# Altium PCB GSH_Bed v1.0.PcbDoc (part 5 of 6)
Units mil, origin at the board's own origin, x right, y up, seen from the top; angles counter-clockwise.
Board outline 4724.41 x 4921.3 mil, 2 copper layers (Top Layer, Bottom Layer); 2 components, 3 nets, 5 pads, 0 vias.
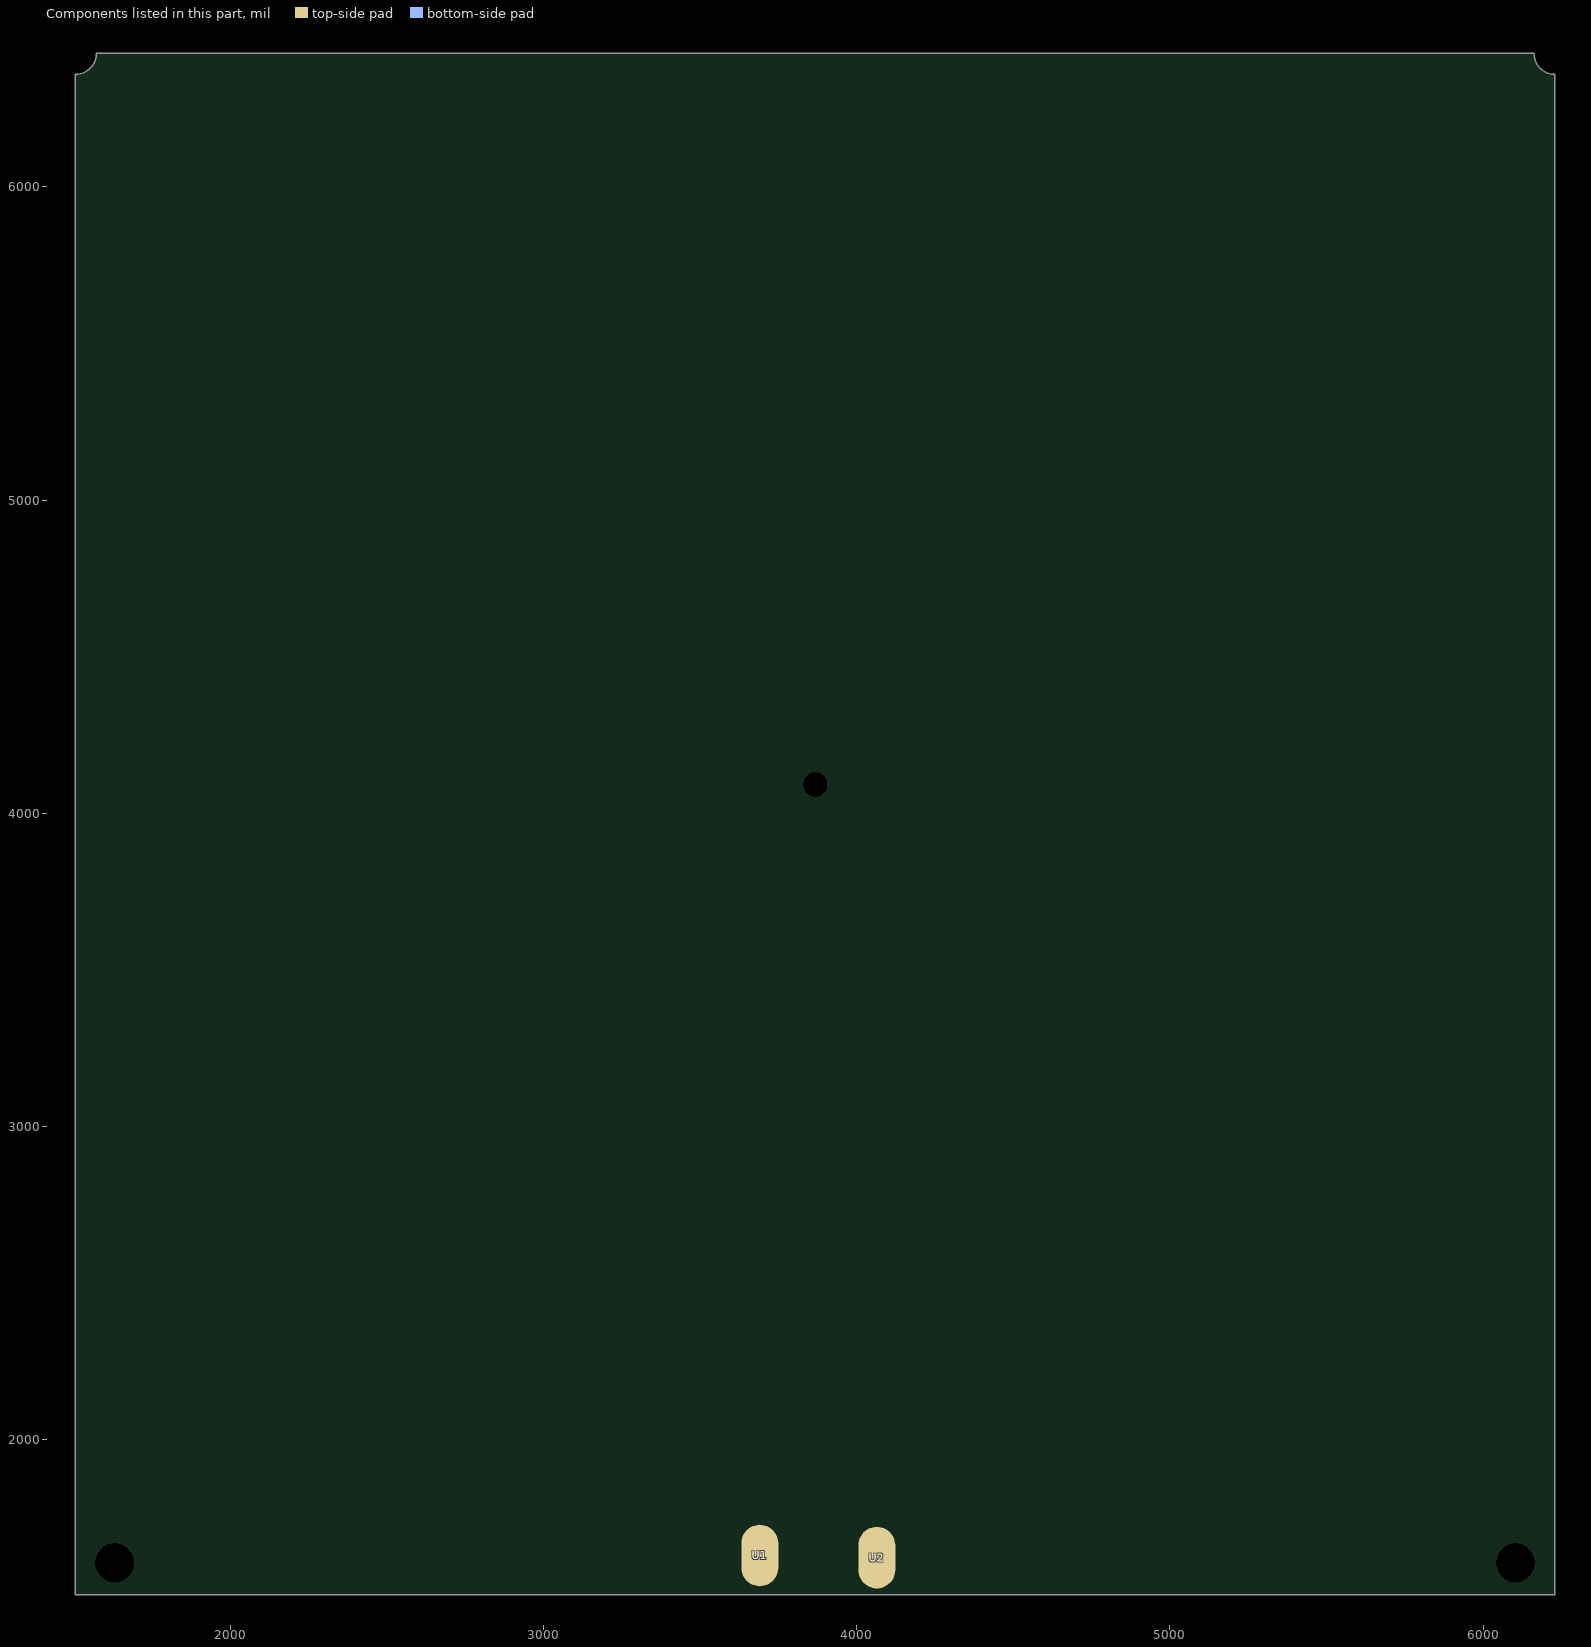
[diagram p5: the components of this part, seen from the top]

## Nets (pads, with @x,y where several pads share a name; then routed paths per layer and width w, separated by ;. In a path a pad name is that pad's centre, name@x,y a point inside that pad or via, vN(x,y) a via of type N, cw(c..) or ccw(c..) an arc to the next point about the centre after c; other vN are vias at no path point) (continued)
copper on no net: (continued)
  Top Layer w25.59: 4133.04,6189.88 4097.61,6189.88 4097.61,6225.32 4133.04,6225.32 4133.04,6296.18 4097.61,6296.18 4097.61,6260.75 4062.17,6260.75 4062.17,6296.18 4026.74,6296.18 4026.74,6225.32 4062.17,6225.32 4062.17,6189.88 4026.74,6189.88 3955.87,6189.88 3955.87,6225.32 3991.31,6225.32 3991.31,6296.19 3955.87,6296.19 3955.87,6260.75 3920.44,6260.75 3920.44,6296.19 3885.01,6296.19 3885.01,6225.32 3920.44,6225.32 3920.44,6189.89 3885.01,6189.89 3885.01,6119.02 3920.44,6119.02 3920.44,6154.45 3991.31,6154.45 3991.31,6119.02 3955.88,6119.02 3955.88,6083.59 3991.31,6083.59 3991.31,6048.15 3920.44,6048.15 3920.44,6083.59 3885,6083.59 3885,6048.15 3885,6012.72 3920.44,6012.72 3920.44,5977.28 3885,5977.28 3885,5906.42 3920.44,5906.42 3920.44,5941.85 3955.87,5941.85 3955.87,5906.42 3991.31,5906.42 3991.31,5977.28 3955.87,5977.28 3955.87,6012.72 4026.74,6012.72 4026.74,5977.29 4062.17,5977.29 4062.17,6012.72 4133.04,6012.72 4133.04,5977.29 4097.61,5977.29 4097.61,5941.85 4133.04,5941.85 4133.04,5906.42 4062.17,5906.42 4062.17,5941.85 4026.73,5941.85 4026.73,5870.98 4026.73,5835.55 4062.17,5835.55 4062.17,5870.98 4133.03,5870.98 4133.03,5835.55 4097.6,5835.55 4097.6,5800.12 4133.03,5800.12 4133.03,5764.69 4062.17,5764.69 4062.17,5800.12 4026.73,5800.12 4026.73,5764.69 3955.86,5764.69 3955.86,5800.13 3991.3,5800.13 3991.3,5870.98 3955.86,5870.98 3955.86,5835.56 3920.43,5835.56 3920.43,5870.98 3884.99,5870.98 3884.99,5800.13 3920.43,5800.13 3920.43,5764.69 3885,5764.69 3884.99,5693.83 3920.43,5693.83 3920.43,5729.26 3991.29,5729.26 3991.29,5693.83 3955.86,5693.83 3955.86,5658.4 3991.29,5658.4 3991.29,5622.96 3920.43,5622.96 3920.43,5658.4 3884.99,5658.4 3884.99,5587.53 3920.42,5587.53 3920.42,5552.09 3884.99,5552.09 3884.99,5481.23 3920.42,5481.23 3920.42,5516.65 3955.86,5516.65 3955.86,5481.23 3991.29,5481.23 3991.29,5552.09 3955.86,5552.09 3955.86,5587.52 3991.29,5587.52 4062.16,5587.52 4062.16,5552.09 4026.72,5552.09 4026.72,5481.22 4062.16,5481.22 4062.16,5516.65 4097.59,5516.65 4097.59,5481.22 4133.02,5481.22 4133.02,5552.09 4097.59,5552.09 4097.59,5587.52 4133.02,5587.52 4133.02,5658.39 4097.59,5658.39 4097.59,5622.95 4026.72,5622.95 4026.72,5658.39 4062.15,5658.39 4062.15,5693.82 4026.72,5693.82 4026.72,5729.25 4097.59,5729.25 4097.59,5693.82 4133.03,5693.82 4133.03,5729.25 4168.46,5729.25 4203.89,5729.25 4203.89,5693.81 4168.46,5693.81 4168.46,5622.95 4203.89,5622.95 4203.89,5658.38 4239.32,5658.38 4239.32,5622.95 4274.76,5622.95 4274.76,5693.81 4239.32,5693.81 4239.32,5729.25 4310.19,5729.25 4310.19,5693.81 4345.62,5693.81 4345.62,5729.25 4416.49,5729.25 4416.49,5693.81 4381.06,5693.81 4381.06,5658.39 4416.49,5658.39 4416.49,5622.95 4345.62,5622.95 4345.62,5658.39 4310.18,5658.39 4310.18,5587.52 4310.18,5552.09 4345.62,5552.09 4345.62,5587.52 4416.48,5587.52 4416.48,5552.09 4381.05,5552.09 4381.05,5516.65 4416.48,5516.65 4416.48,5481.22 4345.62,5481.22 4345.62,5516.65 4310.18,5516.65 4310.18,5481.22 4239.31,5481.22 4239.31,5516.65 4274.75,5516.65 4274.75,5587.52 4239.31,5587.52 4239.31,5552.09 4203.88,5552.09 4203.88,5587.52 4168.45,5587.52 4168.45,5516.65 4203.88,5516.65 4203.88,5481.22 4168.45,5481.23 4168.45,5445.79 4203.89,5445.79 4203.89,5410.35 4168.45,5410.35 4168.45,5339.49 4203.89,5339.49 4203.89,5374.92 4239.31,5374.92 4239.31,5339.49 4274.75,5339.49 4274.75,5410.35 4239.31,5410.35 4239.31,5445.79 4310.18,5445.79 4310.18,5410.35 4345.62,5410.35 4345.62,5445.79 4416.48,5445.79 4416.48,5410.35 4381.05,5410.35 4381.05,5374.92 4416.48,5374.92 4416.48,5339.49 4345.62,5339.49 4345.62,5374.92 4310.18,5374.92 4310.18,5304.06 4310.18,5268.62 4345.61,5268.62 4345.61,5304.06 4416.47,5304.06 4416.47,5268.62 4381.04,5268.62 4381.04,5233.19 4416.47,5233.19 4416.47,5197.76 4345.61,5197.76 4345.61,5233.19 4310.17,5233.19 4310.17,5197.76 4239.31,5197.76 4239.31,5233.2 4274.74,5233.2 4274.74,5304.06 4239.31,5304.06 4239.31,5268.63 4203.88,5268.63 4203.88,5304.06 4168.44,5304.06 4168.44,5233.2 4203.88,5233.2 4203.88,5197.77 4133.01,5197.77 4133.01,5233.2 4097.58,5233.2 4097.58,5197.77 4026.71,5197.77 4026.71,5233.2 4062.14,5233.2 4062.14,5268.63 4026.71,5268.63 4026.71,5304.06 4097.58,5304.06 4097.58,5268.63 4133.02,5268.63 4133.02,5339.49 4097.58,5339.5 4097.58,5374.94 4133.02,5374.94 4133.02,5445.8 4097.58,5445.8 4097.58,5410.36 4062.15,5410.36 4062.15,5445.8 4026.71,5445.8 4026.71,5374.94 4062.15,5374.94 4062.15,5339.5 4026.72,5339.5 3955.85,5339.5 3955.85,5374.94 3991.28,5374.94 3991.28,5445.81 3955.85,5445.81 3955.85,5410.37 3920.42,5410.37 3920.42,5445.81 3884.98,5445.81 3884.98,5374.94 3920.42,5374.94 3920.42,5339.51 3884.98,5339.51 3884.98,5268.64 3920.42,5268.64 3920.42,5304.07 3991.28,5304.07 3991.28,5268.64 3955.85,5268.64 3955.85,5233.21 3991.28,5233.21 3991.28,5197.77 3920.42,5197.77 3920.42,5233.21 3884.98,5233.21 3884.98,5197.77 3884.98,5162.34 3920.41,5162.34 3920.41,5126.9 3884.98,5126.9 3884.98,5056.04 3920.41,5056.04 3920.41,5091.47 3955.85,5091.47 3955.85,5056.04 3991.28,5056.04 3991.28,5126.9 3955.85,5126.9 3955.85,5162.34 4026.71,5162.34 4026.71,5126.9 4062.15,5126.9 4062.15,5162.34 4133.01,5162.34 4133.01,5126.9 4097.58,5126.9 4097.58,5091.47 4133.01,5091.47 4133.01,5056.04 4062.15,5056.04 4062.15,5091.47 4026.71,5091.47 4026.71,5020.6 4026.71,4985.17 4062.14,4985.17 4062.14,5020.61 4133.01,5020.61 4133.01,4985.17 4097.58,4985.17 4097.58,4949.74 4133.01,4949.74 4133.01,4914.31 4062.14,4914.31 4062.14,4949.74 4026.7,4949.74 4026.7,4914.31 3955.84,4914.31 3955.84,4949.75 3991.27,4949.75 3991.27,5020.61 3955.84,5020.61 3955.84,4985.18 3920.4,4985.18 3920.4,5020.61 3884.97,5020.61 3884.97,4949.75 3920.4,4949.75 3920.4,4914.31 3884.97,4914.31 3884.97,4843.45 3920.4,4843.45 3920.4,4878.88 3991.27,4878.88 3991.27,4843.45 3955.84,4843.45 3955.84,4808.01 3991.27,4808.01 3991.27,4772.58 3920.4,4772.58 3920.4,4808.01 3884.97,4808.01 3884.97,4737.15 3920.4,4737.15 3920.4,4701.71 3884.97,4701.71 3884.97,4630.85 3920.4,4630.85 3920.4,4666.28 3955.83,4666.28 3955.83,4630.85 3991.27,4630.85 3991.27,4701.71 3955.83,4701.71 3955.83,4737.15 3991.26,4737.15 4062.13,4737.15 4062.13,4701.7 4026.7,4701.7 4026.7,4630.84 4062.13,4630.84 4062.13,4666.27 4097.56,4666.27 4097.56,4630.84 4133,4630.84 4133,4701.7 4097.56,4701.7 4097.56,4737.14 4133,4737.14 4133,4808 4097.56,4808 4097.56,4772.57 4026.7,4772.57 4026.7,4808 4062.13,4808 4062.13,4843.44 4026.7,4843.44 4026.7,4878.87 4097.56,4878.87 4097.56,4843.44 4133,4843.44 4133,4878.87 4168.43,4878.87 4168.43,4843.44 4203.87,4843.44 4203.87,4878.87 4274.73,4878.87 4274.73,4843.44 4239.3,4843.44 4239.3,4808.01 4274.73,4808.01 4274.73,4772.57 4203.87,4772.57 4203.87,4808.01 4168.43,4808.01 4168.43,4737.15 4203.86,4737.14 4203.86,4701.7 4168.43,4701.7 4168.43,4630.84 4203.86,4630.84 4203.86,4666.27 4239.29,4666.27 4239.29,4630.84 4274.73,4630.84 4274.73,4701.7 4239.29,4701.7 4239.29,4737.14 4274.73,4737.14 4345.59,4737.14 4345.59,4701.7 4310.15,4701.7 4310.15,4630.83 4345.59,4630.83 4345.59,4666.27 4381.02,4666.27 4381.02,4630.83 4416.46,4630.83 4416.46,4701.7 4381.02,4701.7 4381.02,4737.13 4416.45,4737.13 4416.45,4808 4381.02,4808 4381.02,4772.56 4310.15,4772.56 4310.15,4808 4345.59,4808 4345.59,4843.43 4310.15,4843.43 4310.15,4878.87 4381.02,4878.87 4381.02,4843.43 4416.46,4843.43 4416.46,4878.87 4416.46,4914.3 4381.02,4914.3 4381.02,4949.73 4416.46,4949.73 4416.46,5020.6 4381.02,5020.6 4381.02,4985.17 4345.59,4985.17 4345.59,5020.6 4310.16,5020.6 4310.16,4949.73 4345.59,4949.73 4345.59,4914.3 4274.73,4914.3 4274.73,4949.73 4239.29,4949.73 4239.29,4914.3 4168.43,4914.3 4168.43,4949.73 4203.86,4949.73 4203.86,4985.17 4168.43,4985.17 4168.43,5020.6 4239.29,5020.6 4239.29,4985.17 4274.73,4985.17 4274.73,5056.04 4274.73,5091.47 4239.3,5091.47 4239.3,5056.03 4168.44,5056.03 4168.44,5091.47 4203.87,5091.47 4203.87,5126.9 4168.44,5126.9 4168.44,5162.34 4239.3,5162.34 4239.3,5126.9 4274.73,5126.9 4274.73,5162.34 4345.6,5162.34 4345.6,5126.89 4310.17,5126.89 4310.17,5056.03 4345.6,5056.03 4345.6,5091.46 4381.03,5091.46 4381.03,5056.03 4416.47,5056.03 4416.47,5126.89 4381.03,5126.89 4381.03,5162.33 4451.9,5162.32 4451.9,5126.89 4487.33,5126.89 4487.33,5162.33 4558.2,5162.33 4558.2,5126.89 4522.77,5126.89 4522.77,5091.46 4558.2,5091.46 4558.2,5056.02 4487.33,5056.02 4487.33,5091.46 4451.89,5091.46 4451.89,5020.6 4487.33,5020.59 4487.33,4985.15 4451.89,4985.15 4451.89,4914.29 4487.33,4914.29 4487.33,4949.72 4522.76,4949.72 4522.76,4914.29 4558.2,4914.29 4558.2,4985.15 4522.76,4985.15 4522.76,5020.59 4558.19,5020.59 4629.06,5020.59 4629.06,4985.15 4593.63,4985.15 4593.63,4914.29 4629.06,4914.29 4629.06,4949.72 4664.49,4949.72 4664.49,4914.29 4699.93,4914.29 4699.93,4985.15 4664.49,4985.15 4664.49,5020.58 4699.92,5020.58 4699.92,5091.45 4664.49,5091.45 4664.49,5056.02 4593.63,5056.02 4593.63,5091.45 4629.06,5091.45 4629.06,5126.88 4593.63,5126.88 4593.63,5162.32 4664.49,5162.32 4664.49,5126.88 4699.93,5126.88 4699.93,5162.32 4735.36,5162.32 4770.8,5162.32 4770.8,5126.88 4735.36,5126.88 4735.36,5056.01 4770.8,5056.01 4770.8,5091.44 4806.23,5091.44 4806.23,5056.01 4841.66,5056.01 4841.66,5126.88 4806.23,5126.88 4806.23,5162.31 4877.09,5162.31 4877.09,5126.88 4912.53,5126.88 4912.53,5162.31 4983.39,5162.31 4983.39,5126.88 4947.96,5126.88 4947.96,5091.45 4983.39,5091.45 4983.39,5056.01 4912.53,5056.01 4912.53,5091.45 4877.09,5091.45 4877.09,5020.58 4877.09,4985.15 4912.52,4985.15 4912.52,5020.58 4983.39,5020.58 4983.39,4985.15 4947.96,4985.15 4947.96,4949.72 4983.39,4949.72 4983.39,4914.28 4912.52,4914.28 4912.52,4949.72 4877.08,4949.72 4877.08,4914.28 4806.22,4914.28 4806.22,4949.72 4841.65,4949.72 4841.65,5020.58 4806.22,5020.58 4806.22,4985.15 4770.78,4985.15 4770.78,5020.58 4735.35,5020.58 4735.35,4949.72 4770.78,4949.72 4770.78,4914.29 4735.35,4914.29 4735.35,4878.86 4770.79,4878.86 4770.79,4843.42 4735.35,4843.42 4735.35,4772.56 4770.79,4772.56 4770.79,4807.99 4806.22,4807.99 4806.22,4772.56 4841.65,4772.56 4841.65,4843.42 4806.22,4843.42 4806.22,4878.85 4877.09,4878.85 4877.09,4843.42 4912.52,4843.42 4912.52,4878.86 4983.39,4878.86 4983.39,4843.42 4947.95,4843.42 4947.95,4807.99 4983.39,4807.99 4983.39,4772.56 4912.52,4772.56 4912.52,4807.99 4877.08,4807.99 4877.08,4737.12 4877.08,4701.69 4912.52,4701.69 4912.52,4737.12 4983.38,4737.12 4983.38,4701.69 4947.95,4701.69 4947.95,4666.26 4983.38,4666.26 4983.38,4630.82 4912.52,4630.82 4912.52,4666.26 4877.08,4666.26 4877.08,4630.82 ; 5266.82,4630.81 5231.39,4630.81 5231.39,4666.25 5266.82,4666.25 5266.82,4737.11 5231.39,4737.11 5231.39,4701.68 5195.96,4701.68 5195.96,4737.11 5160.52,4737.11 5160.52,4666.25 5195.96,4666.25 5195.96,4630.81 5125.09,4630.81 5125.09,4666.25 5089.66,4666.25 5089.66,4630.81 5018.79,4630.81 5018.79,4666.25 5054.23,4666.25 5054.23,4701.68 5018.79,4701.68 5018.79,4737.11 5089.66,4737.11 5089.66,4701.68 5125.1,4701.68 5125.1,4772.55 5125.1,4807.98 5089.66,4807.98 5089.66,4772.55 5018.8,4772.55 5018.8,4807.98 5054.23,4807.98 5054.23,4843.41 5018.8,4843.41 5018.8,4878.85 5089.66,4878.85 5089.66,4843.41 5125.1,4843.41 5125.1,4878.85 5195.97,4878.85 5195.97,4843.41 5160.54,4843.41 5160.54,4772.55 5195.97,4772.55 5195.97,4807.98 5231.4,4807.98 5231.4,4772.55 5266.84,4772.55 5266.84,4843.41 5231.4,4843.41 5231.4,4878.84 5266.84,4878.84 5266.84,4914.27 5231.4,4914.27 5231.4,4949.71 5266.84,4949.71 5266.84,5020.58 5231.4,5020.58 5231.4,4985.14 5195.97,4985.14 5195.97,5020.58 5160.53,5020.58 5160.53,4949.71 5195.97,4949.71 5195.97,4914.28 5125.1,4914.28 5125.1,4949.71 5089.67,4949.71 5089.67,4914.27 5018.8,4914.27 5018.8,4949.71 5054.23,4949.71 5054.23,4985.14 5018.8,4985.14 5018.8,5020.58 5089.67,5020.58 5089.67,4985.14 5125.11,4985.14 5125.11,5056.01 5125.11,5091.44 5089.67,5091.44 5089.67,5056.01 5018.81,5056.01 5018.81,5091.44 5054.24,5091.44 5054.24,5126.87 5018.81,5126.87 5018.81,5162.31 5089.67,5162.31 5089.67,5126.87 5125.11,5126.87 5125.11,5162.31 5195.98,5162.31 5195.98,5126.86 5160.54,5126.86 5160.54,5056.01 5195.98,5056.01 5195.98,5091.44 5231.41,5091.44 5231.41,5056.01 5266.84,5056.01 5266.84,5126.86 5231.41,5126.86 5231.41,5162.3 5302.27,5162.3 5302.27,5126.86 5337.71,5126.86 5337.71,5162.3 5408.57,5162.3 5408.57,5126.86 5373.14,5126.86 5373.14,5091.44 5408.57,5091.44 5408.57,5056 5337.71,5056 5337.71,5091.44 5302.27,5091.44 5302.27,5020.57 5337.7,5020.56 5337.7,4985.13 5302.27,4985.13 5302.27,4914.27 5337.7,4914.27 5337.7,4949.7 5373.13,4949.7 5373.13,4914.27 5408.57,4914.27 5408.57,4985.13 5373.13,4985.13 5373.13,5020.56 5408.56,5020.56 5479.43,5020.56 5479.43,4985.12 5444,4985.12 5444,4914.26 5479.43,4914.26 5479.43,4949.69 5514.87,4949.69 5514.87,4914.26 5550.3,4914.26 5550.3,4985.12 5514.87,4985.12 5514.87,5020.56 5550.3,5020.56 5550.3,5091.43 5514.86,5091.43 5514.86,5055.99 5444,5055.99 5444,5091.43 5479.43,5091.43 5479.43,5126.85 5444,5126.85 5444,5162.29 5514.86,5162.29 5514.86,5126.85 5550.3,5126.85 5550.3,5162.29 5585.74,5162.29 5621.17,5162.29 5621.17,5126.85 5585.73,5126.85 5585.73,5055.98 5621.17,5055.98 5621.17,5091.42 5656.6,5091.42 5656.6,5055.98 5692.03,5055.98 5692.03,5126.85 5656.6,5126.85 5656.6,5162.29 5727.47,5162.29 5727.47,5126.85 5762.9,5126.85 5762.9,5162.29 5833.77,5162.29 5833.77,5126.85 5798.33,5126.85 5798.33,5091.42 5833.77,5091.42 5833.77,5055.98 5762.9,5055.98 5762.9,5091.42 5727.46,5091.42 5727.46,5020.55 5727.46,4985.12 5762.9,4985.12 5762.9,5020.56 5833.75,5020.56 5833.75,4985.12 5798.32,4985.12 5798.32,4949.69 5833.75,4949.69 5833.75,4914.25 5762.9,4914.25 5762.9,4949.69 5727.45,4949.69 5727.45,4914.25 5656.59,4914.25 5656.59,4949.69 5692.02,4949.69 5692.02,5020.56 5656.59,5020.56 5656.59,4985.13 5621.16,4985.13 5621.16,5020.56 5585.73,5020.56 5585.73,4949.69 5621.16,4949.69 5621.16,4914.26 5585.73,4914.26 5585.73,4843.4 5621.16,4843.4 5621.16,4878.83 5692.02,4878.83 5692.02,4843.4 5656.59,4843.4 5656.59,4807.97 5692.02,4807.97 5692.02,4772.53 5621.16,4772.53 5621.16,4807.97 5585.72,4807.97 5585.72,4737.1 5621.15,4737.1 5621.15,4701.65 5585.72,4701.65 5585.72,4630.79 5621.15,4630.79 5621.15,4666.22 5656.58,4666.22 5656.58,4630.79 5692.02,4630.79 5692.02,4701.65 5656.58,4701.65 5656.58,4737.09 5692.02,4737.09 5762.88,4737.09 5762.88,4701.65 5727.44,4701.65 5727.44,4630.79 5762.88,4630.79 5762.88,4666.22 5798.31,4666.22 5798.31,4630.79 5833.75,4630.79 5833.75,4701.65 5798.31,4701.65 5798.31,4737.09 5833.74,4737.09 5833.74,4807.95 5798.31,4807.95 5798.31,4772.52 5727.44,4772.52 5727.44,4807.95 5762.88,4807.95 5762.88,4843.39 5727.44,4843.39 5727.44,4878.82 5798.31,4878.82 5798.31,4843.39 5833.75,4843.39 5833.75,4878.82 5869.19,4878.82 5869.18,4843.39 5904.61,4843.39 5904.61,4878.82 5975.48,4878.82 5975.48,4843.39 5940.05,4843.39 5940.05,4807.95 5975.48,4807.95 5975.48,4772.52 5904.61,4772.52 5904.61,4807.95 5869.17,4807.95 5869.17,4737.09 5904.61,4737.09 5904.61,4701.65 5869.17,4701.65 5869.17,4630.79 5904.61,4630.79 5904.61,4666.22 5940.04,4666.22 5940.04,4630.79 5975.48,4630.79 5975.48,4701.65 5940.04,4701.65 5940.04,4737.09 5975.48,4737.09 6046.34,4737.09 6046.34,4701.64 6010.91,4701.64 6010.91,4630.78 6046.34,4630.78 6046.34,4666.21 6081.78,4666.21 6081.78,4630.78 6117.21,4630.78 6117.21,4701.64 6081.78,4701.64 6081.78,4737.08 6117.21,4737.08 6117.21,4807.94 6081.78,4807.94 6081.78,4772.51 6010.91,4772.51 6010.91,4807.94 6046.34,4807.94 6046.34,4843.38 6010.91,4843.38 6010.91,4878.81 6081.78,4878.81 6081.78,4843.38 6117.21,4843.38 6117.21,4878.81 6117.21,4914.24 6081.78,4914.24 6081.78,4949.68 6117.21,4949.68 6117.21,5020.55 6081.78,5020.55 6081.78,4985.11 6046.34,4985.11 6046.34,5020.55 6010.91,5020.55 6010.91,4949.68 6046.34,4949.68 6046.34,4914.25 5975.48,4914.25 5975.48,4949.68 5940.04,4949.68 5940.04,4914.25 5869.18,4914.25 5869.18,4949.68 5904.61,4949.68 5904.61,4985.11 5869.18,4985.11 5869.18,5020.55 5940.04,5020.55 5940.04,4985.11 5975.48,4985.11 5975.48,5055.98 5975.48,5091.41 5940.05,5091.41 5940.05,5055.98 5869.19,5055.98 5869.19,5091.41 5904.61,5091.41 5904.61,5126.85 5869.19,5126.85 5869.19,5162.28 5940.05,5162.28 5940.05,5126.85 5975.49,5126.85 5975.49,5162.28 6046.36,5162.28 6046.36,5126.84 6010.92,5126.84 6010.92,5055.98 6046.36,5055.98 6046.36,5091.4 6081.79,5091.4 6081.79,5055.98 6117.23,5055.98 6117.23,5126.84 6081.79,5126.84 6081.79,5162.27 6117.22,5162.27 6117.23,5233.14 6081.8,5233.14 6081.8,5197.7 6010.93,5197.7 6010.93,5233.14 6046.36,5233.14 6046.36,5268.57 6010.93,5268.57 6010.93,5304.01 6081.8,5304.01 6081.8,5268.57 6117.23,5268.57 6117.23,5339.44 6081.8,5339.44 6081.8,5374.87 6117.23,5374.87 6117.23,5445.74 6081.8,5445.74 6081.8,5410.31 6046.37,5410.31 6046.37,5445.74 6010.93,5445.74 6010.93,5374.87 6046.37,5374.87 6046.37,5339.44 6010.94,5339.44 5940.07,5339.44 5940.07,5374.88 5975.5,5374.88 5975.5,5445.74 5940.07,5445.74 5940.07,5410.31 5904.64,5410.31 5904.64,5445.74 5869.2,5445.74 5869.2,5374.88 5904.64,5374.88 5904.64,5339.44 5869.21,5339.44 5869.21,5268.58 5904.64,5268.58 5904.64,5304.02 5975.5,5304.02 5975.5,5268.58 5940.07,5268.58 5940.07,5233.14 5975.5,5233.14 5975.5,5197.71 5904.64,5197.71 5904.64,5233.14 5869.2,5233.14 5869.2,5197.71 5833.77,5197.71 5798.33,5197.71 5798.33,5233.15 5833.77,5233.15 5833.77,5304.02 5798.33,5304.02 5798.33,5268.59 5762.9,5268.59 5762.9,5304.02 5727.47,5304.02 5727.47,5233.15 5762.9,5233.15 5762.9,5197.72 5692.03,5197.72 5692.03,5233.15 5656.6,5233.15 5656.6,5197.72 5585.73,5197.72 5585.73,5233.15 5621.17,5233.15 5621.17,5268.58 5585.73,5268.58 5585.73,5304.02 5656.6,5304.02 5656.6,5268.58 5692.04,5268.58 5692.04,5339.45 5692.04,5374.88 5656.6,5374.88 5656.6,5339.44 5585.74,5339.44 5585.74,5374.88 5621.17,5374.88 5621.17,5410.31 5585.74,5410.31 5585.74,5445.75 5656.6,5445.75 5656.6,5410.31 5692.05,5410.31 5692.05,5445.75 5762.91,5445.75 5762.91,5410.31 5727.47,5410.31 5727.47,5339.44 5762.91,5339.44 5762.91,5374.87 5798.34,5374.87 5798.34,5339.44 5833.77,5339.44 5833.77,5410.31 5798.34,5410.31 5798.34,5445.74 5833.77,5445.74 5833.77,5481.17 5798.34,5481.17 5798.34,5516.61 5833.77,5516.61 5833.77,5587.48 5798.34,5587.48 5798.34,5552.04 5762.91,5552.04 5762.91,5587.48 5727.47,5587.48 5727.47,5516.61 5762.91,5516.61 5762.91,5481.18 5692.04,5481.18 5692.04,5516.6 5656.6,5516.6 5656.6,5481.17 5585.74,5481.17 5585.74,5516.6 5621.17,5516.6 5621.17,5552.04 5585.74,5552.04 5585.74,5587.48 5656.6,5587.48 5656.6,5552.04 5692.05,5552.04 5692.05,5622.9 5692.05,5658.34 5656.61,5658.34 5656.61,5622.9 5585.75,5622.9 5585.75,5658.34 5621.18,5658.34 5621.18,5693.77 5585.75,5693.77 5585.75,5729.2 5656.61,5729.2 5656.61,5693.77 5692.05,5693.77 5692.05,5729.2 5762.92,5729.2 5762.92,5693.77 5727.48,5693.77 5727.48,5622.9 5762.92,5622.9 5762.92,5658.34 5798.35,5658.34 5798.35,5622.9 5833.78,5622.9 5833.78,5693.77 5798.35,5693.77 5798.35,5729.2 5869.22,5729.2 5869.21,5693.77 5904.65,5693.77 5904.65,5729.2 5975.51,5729.2 5975.51,5693.77 5940.08,5693.77 5940.08,5658.34 5975.51,5658.34 5975.51,5622.9 5904.65,5622.9 5904.65,5658.34 5869.21,5658.34 5869.21,5587.47 5904.64,5587.47 5904.64,5552.02 5869.21,5552.02 5869.21,5481.17 5904.64,5481.17 5904.64,5516.6 5940.08,5516.6 5940.08,5481.17 5975.51,5481.17 5975.51,5552.02 5940.08,5552.02 5940.08,5587.46 5975.51,5587.46 6046.38,5587.46 6046.38,5552.02 6010.94,5552.02 6010.94,5481.16 6046.38,5481.16 6046.38,5516.59 6081.81,5516.59 6081.81,5481.16 6117.24,5481.16 6117.24,5552.02 6081.81,5552.02 6081.81,5587.46 6117.24,5587.46 6117.24,5658.33 6081.81,5658.33 6081.81,5622.89 6010.94,5622.89 6010.94,5658.33 6046.37,5658.33 6046.37,5693.76 6010.94,5693.76 6010.94,5729.19 6081.81,5729.19 6081.81,5693.76 6117.24,5693.76 6117.24,5729.19 6117.24,5764.62 6081.81,5764.62 6081.81,5800.06 6117.24,5800.06 6117.24,5870.92 6081.81,5870.92 6081.81,5835.49 6046.38,5835.49 6046.38,5870.92 6010.95,5870.92 6010.95,5800.06 6046.38,5800.06 6046.38,5764.62 5975.51,5764.62 5975.51,5800.06 5940.08,5800.06 5940.08,5764.62 5869.21,5764.62 5869.21,5800.06 5904.65,5800.06 5904.65,5835.49 5869.21,5835.49 5869.21,5870.92 5940.08,5870.92 5940.08,5835.49 5975.52,5835.49 5975.52,5906.36 5975.52,5941.79 5940.08,5941.79 5940.08,5906.35 5869.22,5906.35 5869.22,5941.79 5904.65,5941.79 5904.65,5977.22 5869.22,5977.22 5869.22,6012.65 5940.08,6012.65 5940.08,5977.22 5975.52,5977.22 5975.52,6012.65 ; 5266.83,4630.81 5302.26,4630.81 5302.26,4666.24 5337.7,4666.24 5337.7,4630.81 5408.56,4630.81 5408.56,4666.24 5373.13,4666.24 5373.13,4701.68 5408.56,4701.68 5408.56,4737.11 5337.7,4737.11 5337.7,4701.68 5302.26,4701.68 5302.26,4772.55 5337.69,4772.55 5337.69,4807.98 5302.26,4807.98 5302.26,4878.84 5337.69,4878.84 5337.69,4843.41 5373.13,4843.41 5373.13,4878.84 5408.56,4878.84 5408.56,4807.98 5373.13,4807.98 5373.13,4772.54 5444,4772.54 5479.43,4772.54 5479.43,4807.98 5443.99,4807.98 5443.99,4878.84 5479.43,4878.84 5479.43,4843.41 5514.86,4843.41 5514.86,4878.84 5550.29,4878.84 5550.29,4807.98 5514.86,4807.98 5514.86,4772.53 5550.29,4772.53 5550.29,4701.67 5514.85,4701.67 5514.85,4737.1 5443.99,4737.1 5443.99,4701.67 5479.42,4701.67 5479.42,4666.23 5443.99,4666.23 5443.99,4630.8 5514.85,4630.8 5514.85,4666.23 5550.29,4666.23 5550.28,4595.37 5550.28,4559.94 5514.84,4559.94 5514.84,4595.37 5443.98,4595.37 5443.98,4559.94 5479.41,4559.94 5479.41,4524.5 5443.98,4524.5 5443.98,4489.07 5514.84,4489.07 5514.84,4524.5 5550.28,4524.5 5550.28,4453.63 5514.84,4453.63 5514.84,4418.2 5550.28,4418.2 5550.28,4347.34 5514.84,4347.34 5514.84,4382.77 5479.41,4382.77 5479.41,4347.34 5443.98,4347.34 5443.98,4418.2 5479.41,4418.2 5479.41,4453.64 5408.54,4453.64 5373.11,4453.64 5373.11,4418.21 5408.55,4418.21 5408.55,4347.35 5373.11,4347.35 5373.11,4382.77 5337.68,4382.77 5337.68,4347.35 5302.24,4347.35 5302.24,4418.21 5337.68,4418.21 5337.68,4453.65 5302.24,4453.65 5302.24,4524.51 5337.68,4524.51 5337.68,4489.08 5408.55,4489.08 5408.55,4524.51 5373.12,4524.51 5373.12,4559.94 5408.55,4559.94 5408.55,4595.38 5337.68,4595.38 5337.68,4559.94 5302.25,4559.94 5302.26,4595.38 5231.39,4595.38 5231.39,4559.94 5266.82,4559.94 5266.82,4489.08 5231.39,4489.08 5231.39,4524.51 5195.96,4524.51 5195.96,4489.08 5160.52,4489.08 5160.52,4559.94 5195.96,4559.94 5195.96,4595.38 5125.09,4595.38 5125.09,4559.95 5089.65,4559.95 5089.65,4595.38 5018.79,4595.38 5018.79,4559.95 5054.22,4559.95 5054.22,4524.52 5018.79,4524.52 5018.79,4489.08 5089.65,4489.08 5089.65,4524.52 5125.08,4524.52 5125.08,4489.08 5125.08,4418.22 5089.64,4418.22 5089.64,4453.65 5018.78,4453.65 5018.78,4418.22 5054.21,4418.22 5054.21,4382.79 5018.78,4382.79 5018.78,4347.35 5089.64,4347.35 5089.64,4382.79 5125.08,4382.79 5125.08,4347.35 5195.95,4347.35 5195.95,4382.79 5160.51,4382.79 5160.51,4453.65 5195.95,4453.65 5195.95,4418.22 5231.38,4418.22 5231.38,4453.65 5266.81,4453.65 5266.81,4382.79 5231.38,4382.79 5231.38,4347.35 5266.81,4347.35 5266.81,4311.91 5231.38,4311.92 5231.38,4276.48 5266.81,4276.48 5266.81,4205.62 5231.38,4205.62 5231.38,4241.05 5195.95,4241.05 5195.95,4205.62 5160.51,4205.62 5160.51,4276.48 5195.95,4276.48 5195.95,4311.93 5125.08,4311.93 5125.08,4276.49 5089.64,4276.49 5089.64,4311.93 5018.78,4311.93 5018.78,4276.49 5054.21,4276.49 5054.21,4241.06 5018.78,4241.06 5018.78,4205.62 5089.64,4205.62 5089.64,4241.06 5125.08,4241.06 5125.08,4205.63 5125.08,4134.76 5089.64,4134.76 5089.64,4170.19 5018.77,4170.19 5018.77,4134.76 5054.2,4134.76 5054.2,4099.33 5018.77,4099.33 5018.77,4063.89 5089.64,4063.89 5089.64,4099.33 5125.07,4099.33 5125.07,4063.89 5195.94,4063.89 5195.94,4099.33 5160.5,4099.33 5160.5,4170.19 5195.94,4170.19 5195.94,4134.76 5231.37,4134.76 5231.37,4170.19 5266.81,4170.19 5266.81,4099.33 5231.37,4099.33 5231.37,4063.89 5266.81,4063.89 5302.23,4063.89 5302.23,4099.32 5337.67,4099.32 5337.67,4063.89 5408.54,4063.89 5408.54,4099.32 5373.11,4099.32 5373.11,4134.76 5408.54,4134.76 5408.54,4170.19 5337.67,4170.19 5337.67,4134.76 5302.24,4134.76 5302.24,4205.62 5337.67,4205.62 5337.67,4241.06 5302.24,4241.06 5302.24,4311.92 5337.67,4311.92 5337.67,4276.49 5373.1,4276.49 5373.1,4311.92 5408.54,4311.92 5408.54,4241.06 5373.1,4241.06 5373.1,4205.62 5443.97,4205.62 5479.4,4205.62 5479.4,4241.05 5443.97,4241.05 5443.97,4311.91 5479.4,4311.91 5479.4,4276.48 5514.84,4276.48 5514.84,4311.91 5550.27,4311.91 5550.27,4241.05 5514.84,4241.05 5514.84,4205.61 5550.27,4205.61 5550.27,4134.75 5514.83,4134.75 5514.83,4170.18 5443.97,4170.18 5443.97,4134.75 5479.4,4134.75 5479.4,4099.31 5443.97,4099.31 5443.97,4063.88 5514.83,4063.88 5514.83,4099.31 5550.27,4099.31 5550.26,4063.88 5621.13,4063.88 5621.13,4099.31 5585.7,4099.31 5585.7,4170.18 5621.13,4170.18 5621.13,4134.75 5656.56,4134.75 5656.56,4170.18 5692,4170.18 5692,4099.31 5656.56,4099.31 5656.56,4063.87 5727.43,4063.87 ; 5550.23,2788.32 5550.23,2717.46 5514.79,2717.46 5514.79,2752.89 5443.93,2752.89 5443.93,2717.46 5479.36,2717.46 5479.36,2682.03 5443.93,2682.03 5443.93,2646.59 5514.79,2646.59 5514.79,2682.03 5550.22,2682.03 5550.22,2611.16 5514.79,2611.16 5514.79,2575.73 5550.22,2575.73 5550.22,2504.86 5514.79,2504.86 5514.79,2540.29 5479.36,2540.29 5479.36,2504.86 5443.93,2504.86 5443.93,2575.73 5479.36,2575.73 5479.36,2611.17 5408.49,2611.17 5408.49,2575.73 5373.06,2575.73 5373.06,2611.17 5302.19,2611.17 5302.19,2575.73 5337.62,2575.73 5337.62,2540.3 5302.19,2540.3 5302.19,2504.86 5373.06,2504.86 5373.06,2540.3 5408.48,2540.3 5408.48,2504.87 5408.48,2434 5373.05,2434 5373.05,2469.43 5302.18,2469.43 5302.18,2434 5337.62,2434 5337.62,2398.57 5302.18,2398.57 5302.18,2363.14 5373.05,2363.14 5373.05,2398.57 5408.48,2398.57 5408.48,2363.14 5479.35,2363.14 5479.35,2398.57 5443.91,2398.57 5443.91,2469.43 5479.35,2469.43 5479.35,2434.01 5514.78,2434.01 5514.78,2469.43 5550.22,2469.43 5550.22,2398.57 5514.78,2398.57 5514.78,2363.13 5550.22,2363.13 5621.08,2363.13 5621.08,2398.56 5585.64,2398.56 5585.64,2469.42 5621.08,2469.42 5621.08,2433.99 5656.51,2433.99 5656.51,2469.42 5691.95,2469.42 5691.95,2398.56 5656.51,2398.56 5656.51,2363.12 5727.38,2363.12 5727.38,2398.56 5762.82,2398.56 5762.82,2363.12 5833.69,2363.12 5833.69,2398.56 5798.26,2398.56 5798.26,2433.99 5833.69,2433.99 5833.69,2469.42 5762.82,2469.42 5762.82,2433.99 5727.39,2433.99 5727.39,2469.41 5727.39,2540.28 5762.83,2540.28 5762.83,2504.85 5833.69,2504.85 5833.69,2540.28 5798.26,2540.28 5798.26,2575.72 5833.69,2575.72 5833.69,2611.15 5762.83,2611.15 5762.83,2575.72 5727.39,2575.72 5727.39,2611.15 5656.52,2611.15 5656.52,2575.71 5691.96,2575.71 5691.96,2504.85 5656.52,2504.85 5656.52,2540.28 5621.09,2540.28 5621.09,2504.85 5585.65,2504.85 5585.65,2575.71 5621.09,2575.71 5621.09,2611.15 5585.65,2611.15 5585.65,2646.58 5585.65,2682.02 5621.1,2682.02 5621.1,2646.59 5691.96,2646.59 5691.96,2682.02 5656.53,2682.02 5656.53,2717.45 5691.96,2717.45 5691.96,2752.89 5621.1,2752.89 5621.1,2717.45 5585.66,2717.45 5585.66,2788.32 5621.1,2788.32 5621.1,2823.76 5585.66,2823.76 5585.66,2894.62 5621.1,2894.62 5621.1,2859.19 5656.52,2859.19 5656.52,2894.62 5691.96,2894.62 5691.96,2823.76 5656.52,2823.76 5656.52,2788.32 5727.4,2788.32 5762.83,2788.32 5762.83,2823.75 5727.39,2823.75 5727.39,2894.61 5762.83,2894.61 5762.83,2859.18 5798.26,2859.18 5798.26,2894.61 5833.69,2894.61 5833.69,2823.75 5798.26,2823.75 5798.26,2788.31 5833.69,2788.31 5833.69,2717.44 5798.26,2717.44 5798.26,2752.88 5727.39,2752.88 5727.39,2717.44 5762.82,2717.44 5762.82,2682.01 5727.39,2682.01 5727.39,2646.58 5798.26,2646.58 5798.26,2682.01 5833.69,2682.01 5833.69,2646.58 5869.12,2646.58 5869.12,2682.02 5904.56,2682.02 5904.56,2646.58 5975.42,2646.58 5975.42,2682.02 5939.99,2682.02 5939.99,2717.45 5975.42,2717.45 5975.42,2752.88 5904.56,2752.88 5904.56,2717.45 5869.12,2717.45 5869.12,2788.31 5904.55,2788.31 5904.55,2823.75 5869.12,2823.75 5869.12,2894.61 5904.55,2894.61 5904.55,2859.18 5939.99,2859.18 5939.99,2894.61 5975.42,2894.61 5975.42,2823.75 5939.99,2823.75 5939.99,2788.31 6010.85,2788.31 6046.29,2788.31 6046.29,2823.74 6010.85,2823.74 6010.85,2894.61 6046.29,2894.61 6046.29,2859.18 6081.72,2859.18 6081.72,2894.61 6117.15,2894.61 6117.15,2823.74 6081.72,2823.74 6081.72,2788.3 6117.15,2788.3 6117.15,2717.44 6081.71,2717.44 6081.71,2752.87 6010.85,2752.87 6010.85,2717.44 6046.28,2717.44 6046.28,2682 6010.85,2682 6010.85,2646.57 6081.71,2646.57 6081.71,2682 6117.15,2682 6117.15,2611.14 6081.71,2611.14 6081.71,2575.7 6117.15,2575.7 6117.15,2504.84 6081.71,2504.84 6081.71,2540.28 6046.28,2540.28 6046.28,2504.84 6010.85,2504.84 6010.85,2575.7 6046.28,2575.7 6046.28,2611.14 5975.42,2611.14 5975.41,2575.71 5939.97,2575.71 5939.97,2611.14 5869.11,2611.14 5869.11,2575.71 5904.55,2575.71 5904.55,2540.28 5869.11,2540.28 5869.11,2504.84 5939.97,2504.84 5939.97,2540.28 5975.41,2540.28 5975.41,2504.85 5975.41,2433.98 5939.97,2433.98 5939.97,2469.41 5869.1,2469.41 5869.1,2433.98 5904.54,2433.98 5904.54,2398.55 5869.1,2398.55 5869.1,2363.11 5939.97,2363.11 5939.97,2398.55 5975.4,2398.55 5975.4,2363.12 6046.27,2363.12 6046.27,2398.55 6010.84,2398.55 6010.84,2469.41 6046.27,2469.41 6046.27,2433.98 6081.7,2433.98 6081.7,2469.41 6117.14,2469.41 6117.14,2398.55 6081.7,2398.55 6081.7,2363.11 6117.14,2363.11 6117.14,2327.68 6117.14,2292.25 6081.7,2292.25 6081.7,2327.68 6010.83,2327.68 6010.83,2292.25 6046.26,2292.25 6046.26,2256.81 6010.83,2256.81 6010.83,2221.38 6081.7,2221.38 6081.7,2256.81 6117.13,2256.81 6117.13,2185.95 6081.7,2185.95 6081.7,2150.51 6117.13,2150.51 6117.13,2079.64 6081.7,2079.64 6081.7,2115.08 6046.27,2115.08 6046.27,2079.64 6010.83,2079.64 6010.83,2150.51 6046.27,2150.51 6046.27,2185.95 5975.4,2185.95 5939.97,2185.95 5939.97,2150.51 5975.4,2150.51 5975.4,2079.66 5939.97,2079.66 5939.97,2115.09 5904.53,2115.09 5904.53,2079.66 5869.1,2079.66 5869.1,2150.51 5904.53,2150.51 5904.53,2185.96 5869.1,2185.96 5869.1,2256.83 5904.54,2256.83 5904.54,2221.39 5975.4,2221.39 5975.4,2256.83 5939.97,2256.83 5939.97,2292.26 5975.4,2292.26 5975.4,2327.69 5904.54,2327.69 5904.54,2292.26 5869.1,2292.26 5869.11,2327.69 5798.24,2327.69 5798.24,2292.26 5833.68,2292.26 5833.68,2221.39 5798.24,2221.39 5798.24,2256.83 5762.81,2256.83 5762.81,2221.39 5727.38,2221.39 5727.38,2292.26 5762.81,2292.26 5762.81,2327.7 5691.95,2327.7 5691.94,2292.26 5656.5,2292.26 5656.5,2327.7 5585.64,2327.7 5585.64,2292.26 5621.07,2292.26 5621.07,2256.83 5585.64,2256.83 5585.64,2221.39 5656.5,2221.39 5656.5,2256.83 5691.94,2256.83 5691.94,2221.39 5691.94,2150.53 5656.5,2150.53 5656.5,2185.97 5585.63,2185.97 5585.63,2150.53 5621.06,2150.53 5621.06,2115.1 5585.63,2115.1 5585.63,2079.66 5656.5,2079.66 5656.5,2115.1 5691.93,2115.1 5691.93,2079.67 5762.8,2079.67 5762.8,2115.1 5727.37,2115.1 5727.37,2185.97 5762.8,2185.97 5762.8,2150.53 5798.23,2150.53 5798.23,2185.97 5833.67,2185.97 5833.67,2115.1 5798.23,2115.1 5798.23,2079.66 5833.67,2079.66 5833.67,2044.22 5798.24,2044.23 5798.24,2008.8 5833.67,2008.8 5833.67,1937.93 5798.24,1937.93 5798.24,1973.37 5762.8,1973.37 5762.8,1937.93 5727.37,1937.93 5727.37,2008.8 5762.8,2008.8 5762.8,2044.24 5691.94,2044.24 5691.94,2008.81 5656.49,2008.81 5656.49,2044.24 5585.63,2044.24 5585.63,2008.81 5621.06,2008.81 5621.06,1973.37 5585.63,1973.37 5585.63,1937.93 5656.49,1937.93 5656.49,1973.37 5691.93,1973.37 5691.93,1937.94 5691.93,1867.07 5656.49,1867.07 5656.49,1902.51 5585.63,1902.51 5585.63,1867.07 5621.06,1867.07 5621.06,1831.64 5585.63,1831.64 5585.63,1796.21 5656.49,1796.21 5656.49,1831.64 5691.93,1831.64 5691.93,1796.21 5762.79,1796.21 5762.79,1831.64 5727.36,1831.64 5727.36,1902.51 5762.79,1902.51 5762.79,1867.08 5798.23,1867.08 5798.23,1902.51 5833.66,1902.51 5833.66,1831.64 5798.23,1831.64 5798.23,1796.2 5833.66,1796.2 5869.09,1796.2 5869.09,1831.64 5904.53,1831.64 5904.53,1796.2 5975.39,1796.2 5975.39,1831.64 5939.96,1831.64 5939.96,1867.07 5975.39,1867.07 5975.39,1902.51 5904.53,1902.51 5904.53,1867.07 5869.1,1867.07 5869.1,1937.93 5904.53,1937.93 5904.53,1973.37 5869.1,1973.37 5869.1,2044.23 5904.53,2044.23 5904.53,2008.81 5939.96,2008.81 5939.96,2044.23 5975.39,2044.23 5975.39,1973.37 5939.96,1973.37 5939.96,1937.93 6010.83,1937.93 6046.26,1937.93 6046.26,1973.37 6010.82,1973.37 6010.82,2044.22 6046.26,2044.22 6046.26,2008.8 6081.69,2008.8 6081.69,2044.22 6117.13,2044.22 6117.13,1973.37 6081.69,1973.37 6081.69,1937.93 6117.13,1937.93 6117.13,1867.06 6081.69,1867.06 6081.69,1902.5 6010.82,1902.5 6010.82,1867.06 6046.25,1867.06 6046.25,1831.63 6010.82,1831.63 6010.82,1796.19 6081.69,1796.19 6081.69,1831.63 6117.12,1831.63 6117.11,1760.76